# Altium PCB CP2102.PcbDoc
Units mil, origin at the board's own origin, x right, y up, seen from the top; angles counter-clockwise.
Board outline 720 x 630 mil, 2 copper layers (Top Layer, Bottom Layer); 13 components, 11 nets, 65 pads, 9 vias.
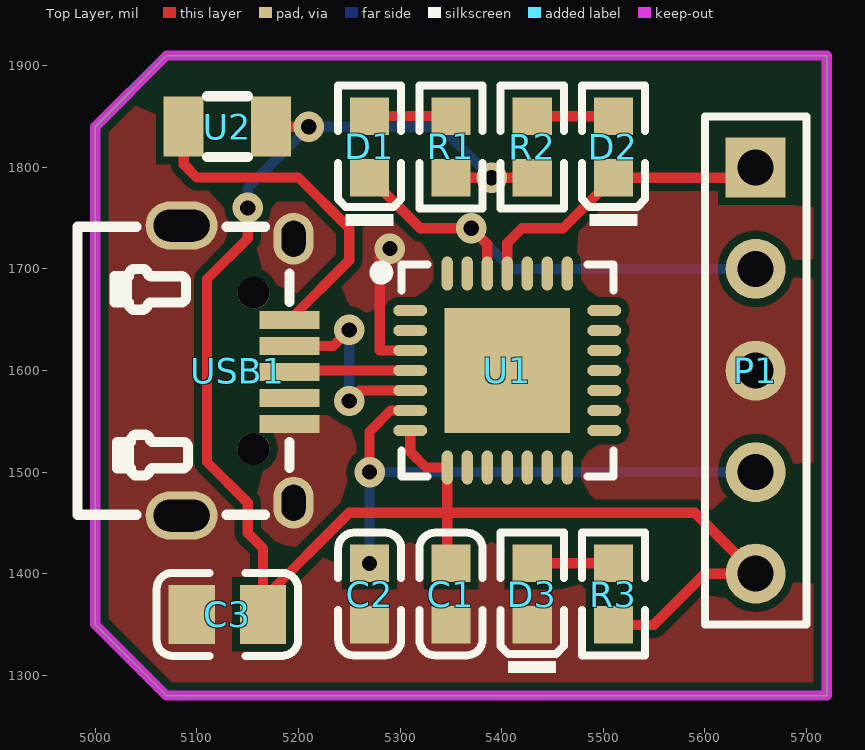
[diagram p0: Top Layer view]
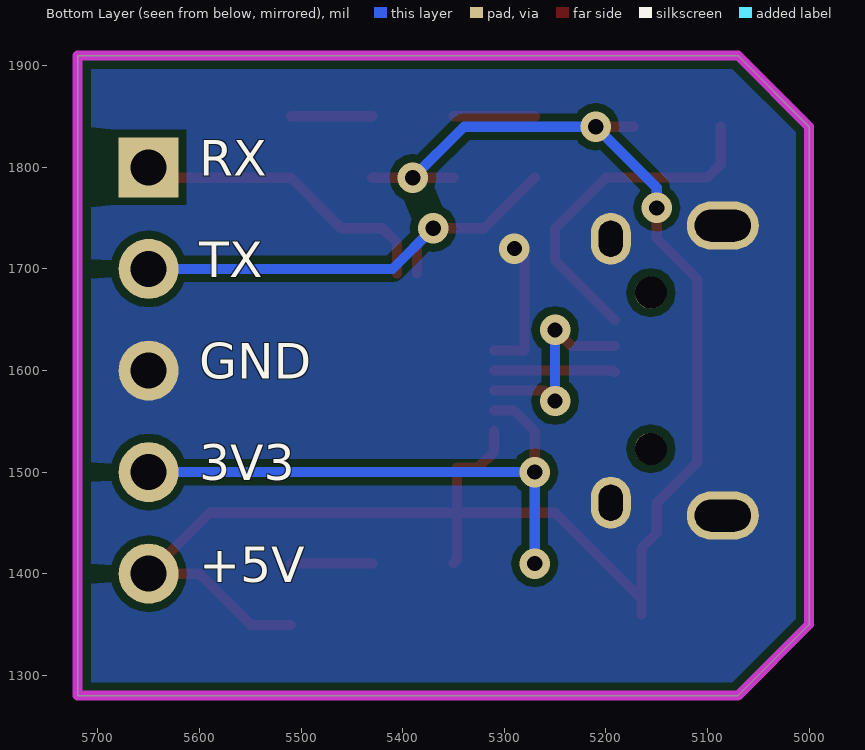
[diagram p1: Bottom Layer view, seen from below]
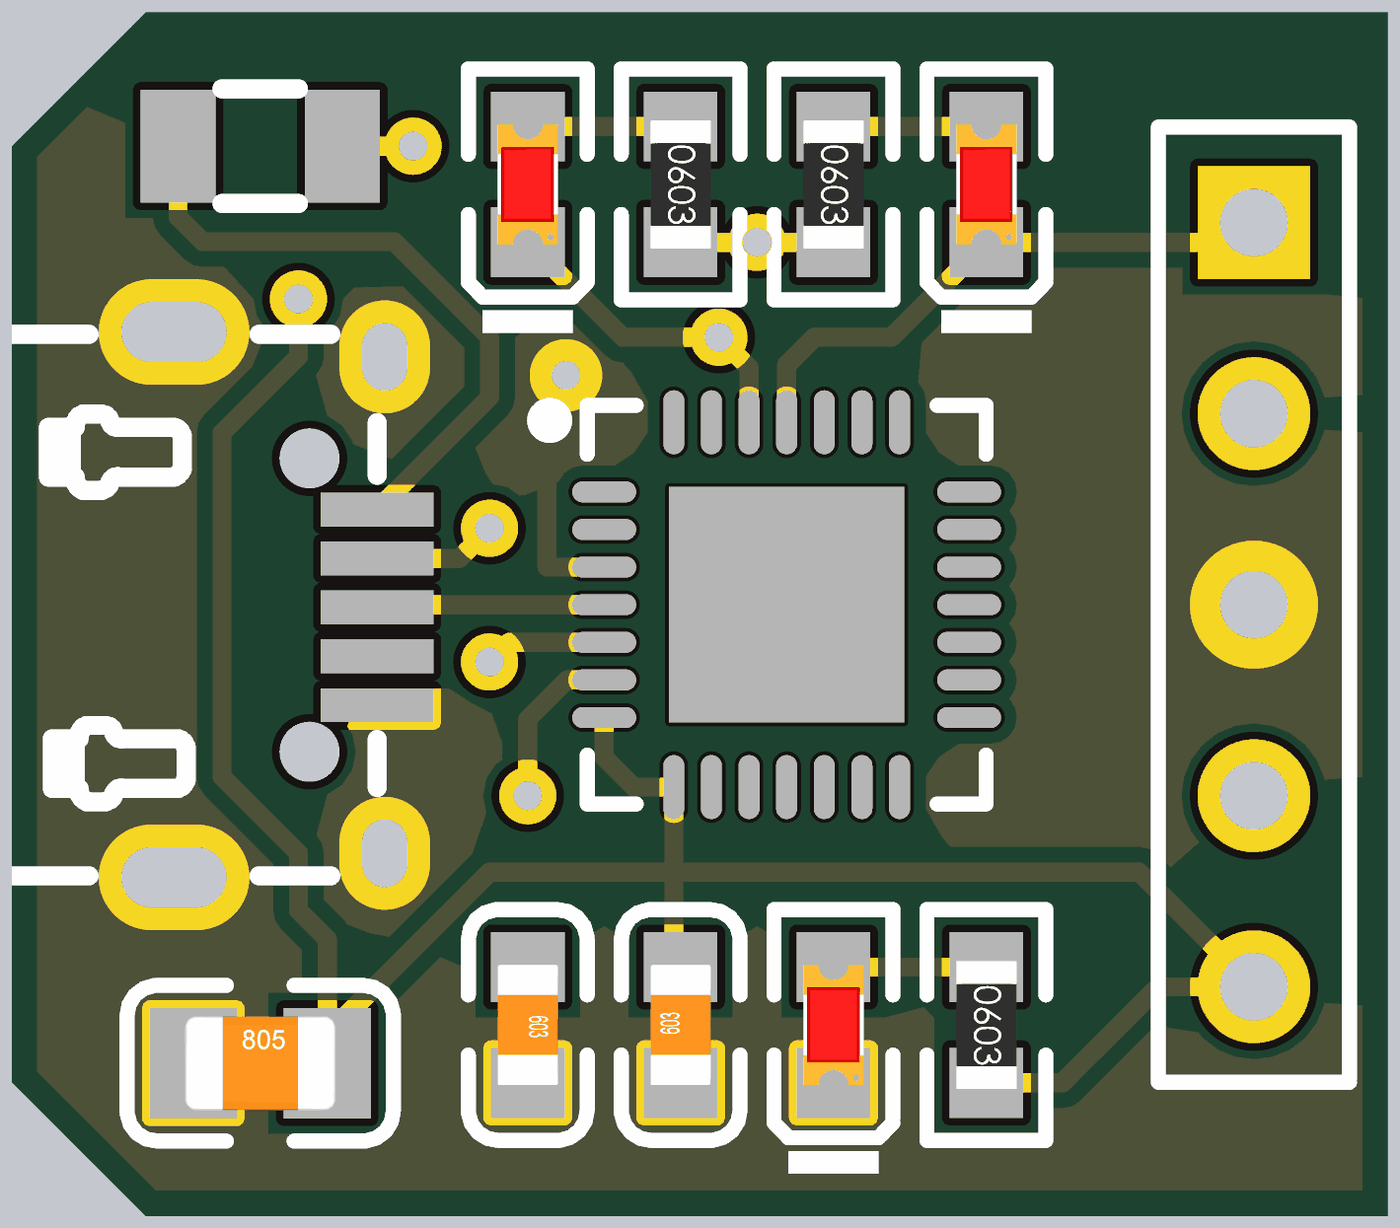
[diagram p2: 3D render of the assembled board from above, using the file's embedded part models]

## Layer stack, top to bottom
Top Solder: solder mask 0.4, Solder Resist, Dk 3.5
Top Layer: signal copper 1.4
Dielectric1: dielectric 12.6, FR-4, Dk 4.8
Bottom Layer: signal copper 1.4
Bottom Solder: solder mask 0.4, Solder Resist, Dk 3.5

## Board outline
5000,1350 5070,1280 5720,1280 5720,1910 5070,1910 5000,1840

## Design rules (kind name [scope] priority, off if disabled: settings)
Clearance [All] p1: gap=8
FabricationTestPointUsage TestPointUsage [All] p1: valid=0 allowmultiple=FALSE
FabricationTestpoint Testpoint [All] p1: side=3 testpointundercomponent=TRUE minsize=40 maxsize=100 preferedsize=60 minholesize=0 maxholesize=40 preferedholesize=32 testpointgrid=1 allowsidetop=TRUE allowsidebottom=TRUE usegrid=TRUE gridtolerance=0.01
PlaneConnect [All] p1: planeconnectstyle=Direct reliefexpansion=20 reliefentries=4 reliefconductorwidth=10 reliefairgap=10
PolygonConnect [All] p1: connectstyle=Direct reliefconductorwidth=10 reliefentries=4 polygonreliefangle="90 Angle" airgapwidth=10
RoutingVias [All] p1: holewidth=20 width=50 viastyle="Through Hole" minholewidth=15 minwidth=20 maxholewidth=28 maxwidth=50
SilkToSolderMaskClearance SilkscreenOverComponentPads [IsPad] p1: minsilkscreentomaskgap=10 clearancetoexposedcopper=TRUE
SolderMaskExpansion [All] p1: expansion=4
Width [All] p1: maxlimit=20 minlimit=8 preferedwidth=10
26 further rules are at their usual default settings.

## Components (designator, comment, footprint, x,y, rotation, side; value= is the part's Value field where it differs from the comment)
C1 "1uF (105) 10% 50V" 0603_C 5350,1380 r90 top
C2 "1uF (105) 10% 50V" 0603_C 5270,1380 r270 top
C3 "10uF (106) 10% 25V" 0805_C 5130,1360 r0 top
D1 "蓝灯 0603" 0603_LED_S1 5270,1820 r90 top
D2 "黄灯 0603" 0603_LED_S1 5510,1820 r90 top
D3 "绿灯 0603" 0603_LED_S1 5430,1380 r90 top
P1 "Header 5" HDR1X5 5650,1800 r270 top
R1 "1KΩ (1001) ±1%" 0603_R 5350,1820 r270 top
R2 "1KΩ (1001) ±1%" 0603_R 5430,1820 r270 top
R3 "1KΩ (1001) ±1%" 0603_R 5510,1380 r270 top
U1 "CP2102-GMR" QFN-28_5x5x05P 5405.47,1600 r270 top
U2 "TLC-PSMD050" PTC0805 5130,1840 r0 top
USB1 "U-F-M5DD-Y-L1" MICRO-USB-SMD_MICRO-USB-A8 5140,1600 r270 top

## Footprints (in the part's own frame and the unit in brackets; to place one, negate y for a bottom-side part, rotate by r counter-clockwise, add the part's x,y. Pads: shape width x height; smd on the part's side, far side on the other; paste and mask are expansions set on the pad)
0603_C [mm]
  rect 0.93x0.98 smd: 1(-0.77,0) 2(0.77,0)
  silkscreen extent -1.53,-0.79 1.54,0.79, body extent -0.8,-0.4 0.8,0.4, height 0.3
0603_LED_S1 [mm]
  rect 0.93x0.98 smd: A(0.77,0) K(-0.77,0)
  silkscreen extent -1.98,-0.79 1.54,0.79, body extent -0.8,-0.4 0.8,0.4, height 0.6
0603_R [mm]
  rect 0.93x0.98 smd: 1(-0.77,0) 2(0.77,0)
  silkscreen extent -1.53,-0.79 1.54,0.79, body extent -0.85,-0.4 0.85,0.4, height 0.56
0805_C [mm]
  rect 1.16x1.47 smd: 1(-0.89,0) 2(0.89,0)
  silkscreen extent -1.77,-1.04 1.77,1.04, body extent -1,-0.62 1,0.63, height 0.77
HDR1X5 [mm] "Connector; Header; 5 Position"
  rect 1.5x1.5 hole 0.9: 1(0,0)
  round 1.5 hole 0.9: 2(2.54,0) 3(5.08,0) 4(7.62,0) 5(10.16,0)
  silkscreen extent -1.27,-1.27 11.43,1.27
MICRO-USB-SMD_MICRO-USB-A8 [mm]
  rect 0.45x1.5 smd: 1(-1.265,1.3) 2(-0.615,1.3) 3(0.036,1.3) 4(0.686,1.3) 5(1.336,1.3)
  oval 1.299x1 hole 0.6 slot 0.9 at 0 deg: 6(3.305,1.401) 7(-3.295,1.401)
  oval 1.2x1.8 hole 0.8 slot 1.4 at 90 deg: 8(3.625,-1.4) 9(-3.625,-1.4)
  round 0.8 hole 0.8 unplated: ""(-1.946,0.401) ""(1.956,0.401)
  silkscreen extent -3.59,-4 3.61,1.3
PTC0805 [mil]
  rect 39.4x59.1 smd: 1(-43,0) 2(43,0)
  silkscreen extent -20,-30 20,30
QFN-28_5x5x05P [mm]
  rect 3.13x3.13 smd mask+0.051: 0(0,0)
  oval 0.28x0.85 smd mask+0.051: 1(-1.5,-2.425) 2(-1,-2.425) 3(-0.5,-2.425) 4(0,-2.425) 5(0.5,-2.425) 6(1,-2.425) 7(1.5,-2.425) 15(1.5,2.425) 16(1,2.425) 17(0.5,2.425) 18(0,2.425) 19(-0.5,2.425) 20(-1,2.425) 21(-1.5,2.425)
  oval 0.85x0.28 smd mask+0.051: 8(2.425,-1.5) 9(2.425,-1) 10(2.425,-0.5) 11(2.425,0) 12(2.425,0.5) 13(2.425,1) 14(2.425,1.5) 22(-2.425,1.5) 23(-2.425,1) 24(-2.425,0.5) 25(-2.425,0) 26(-2.425,-0.5) 27(-2.425,-1) 28(-2.425,-1.5)
  silkscreen extent -2.65,-3.3 2.65,2.65

## Part data
C1 C2: library part "0603 1uF (105) 10% 50V", "贴片电容"
C3: library part "0805 10uF (106) 10% 25V", "贴片电容"
D1: library part "0603 蓝灯", "发光二极管"
D2: library part "0603 黄灯", "发光二极管"
D3: library part "0603 绿灯", "发光二极管"
P1: "Header, 5-Pin"
R1 R2 R3: library part "0603 1KΩ (1001) 1%", "贴片电阻"
U1: library part CP2102-GMR_[C6568], "USB"

## Via types
v1: diameter 30, hole 15, Top Layer to Bottom Layer, 9 vias

## Nets (pads, with @x,y where several pads share a name; then routed paths per layer and width w, separated by ;. In a path a pad name is that pad's centre, name@x,y a point inside that pad or via, vN(x,y) a via of type N, cw(c..) or ccw(c..) an arc to the next point about the centre after c; other vN are vias at no path point)
3V3: C2.1 P1.4 U1.6 | length 558.9
  Top Layer w10: v1(5270,1410) C2.1 ; v1(5270,1500) 5270,1540 5290.63,1560.63 U1.6
  Bottom Layer w10: v1(5270,1410) v1(5270,1500) P1.4
+5V: C1.2 C3.2 P1.5 R1.2 R2.2 R3.2 U1.7 U1.8 U2.2 | length 1727.4
  Top Layer w10: v1(5150,1760) 5150,1730 5110,1690 5110,1510 5150,1470 5150,1440 5165.04,1424.96 C3.2@5165.04,1375.04 ; C3.2 C3.2@5165.04,1375.04 ; U2.2 v1(5210,1840) ; U1.7 5310,1520 5325.47,1504.53 U1.8 5346.42,1460 ; C1.2 5346.42,1413.9 5346.42,1460 ; R1.2 v1(5390,1789.68) R2.2 ; R3.2 5549.68,1349.68 5600,1400 P1.5 5590,1460 5346.42,1460 ; C3.2@5165.04,1375.04 5250,1460 5346.42,1460
  Bottom Layer w10: v1(5150,1760) 5150,1780 v1(5210,1840) 5339.68,1840 v1(5390,1789.68)
D+: U1.4 USB1.3 | length 119.4
  Top Layer w10: USB1.3 5192.6,1600 U1.4
D-: U1.5 USB1.2 | length 199.6
  Top Layer w10: USB1.2 5234.2,1624.2 v1(5250,1640) ; v1(5250,1570) 5260.31,1580.31 U1.5
  Bottom Layer w10: v1(5250,1570) v1(5250,1640)
GND: C1.1 C2.2 C3.1 D3.K P1.3 U1.3 USB1.5 USB1.6 USB1.7 USB1.8 USB1.9 | length 134.3
  Top Layer w10: v1(5290,1720) 5280,1710 5280,1620 5280.31,1619.68 U1.3
NetD1_A: D1.A R1.1 | length 80
  Top Layer w10: D1.A R1.1
NetD2_A: D2.A R2.1 | length 80
  Top Layer w10: R2.1 D2.A
NetD3_A: D3.A R3.1 | length 80
  Top Layer w10: D3.A R3.1
NetU2_1: U2.1 USB1.1 | length 340.7
  Top Layer w10: U2.1 5087,1803 5100,1790 5200,1790 5250,1740 5250,1708.6 USB1.1
RXD: D2.K P1.1 U1.25 | length 305.4
  Top Layer w10: U1.25 5405.47,1725.47 5420,1740 5460.31,1740 D2.K 5639.69,1789.69 P1.1
TXD: D1.K P1.2 U1.26 | length 468.2
  Top Layer w10: D1.K 5319.69,1740 v1(5370,1740) 5385.79,1724.21 U1.26
  Bottom Layer w10: v1(5370,1740) 5410,1700 P1.2
pads on no net: U1.0 U1.1 U1.2 U1.9 U1.10 U1.11 U1.12 U1.13 U1.14 U1.15 U1.16 U1.17 U1.18 U1.19 U1.20 U1.21 U1.22 U1.23 U1.24 U1.27 U1.28 USB1. USB1.4

## Polygon pours and split planes (outlines as drawn)
GND on Bottom Layer "bottom Layer-gnd" (solid, remove dead copper, pour order 2): 5720,1910 5720,1280 5070,1280 5000,1350 5000,1840 5070,1910 5720,1910
GND on Top Layer "top Layer-gnd" (solid, remove dead copper, pour order 6): 5720,1910 5720,1280 5070,1280 5000,1350 5000,1840 5070,1910 5720,1910

## Keep-outs
Keep-Out Layer:
  the board outline again, w10

## Silkscreen, mask and mechanical layers (free items; w line width, h text height)
Bottom Overlay:
  text "RX" at 5600,1780 h60
  text "TX" at 5600,1680 h60
  text "GND" at 5600,1580 h60
  text "3V3" at 5600,1480 h60
  text "+5V" at 5600,1380 h60
  text "GND" at 5910,1370 h60 r180